# EAGLE board Mini_Rocket_V1 (EAGLE 9.6.2)
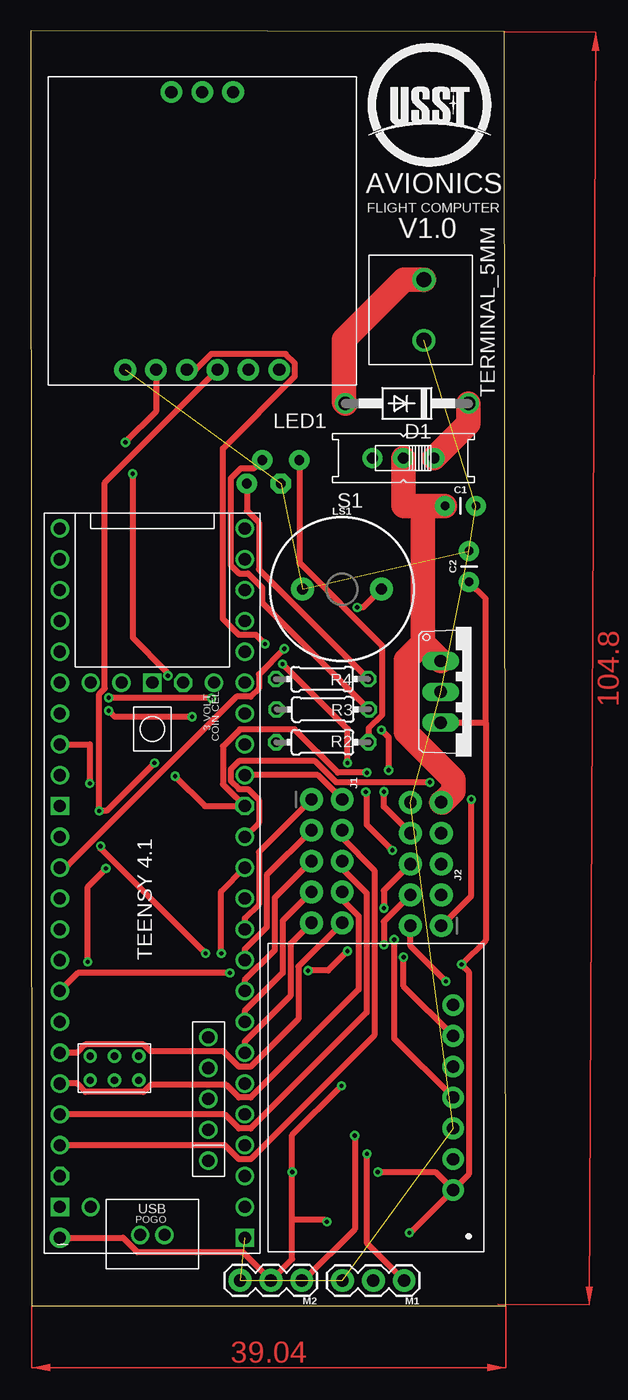
[diagram p0: board, top side]
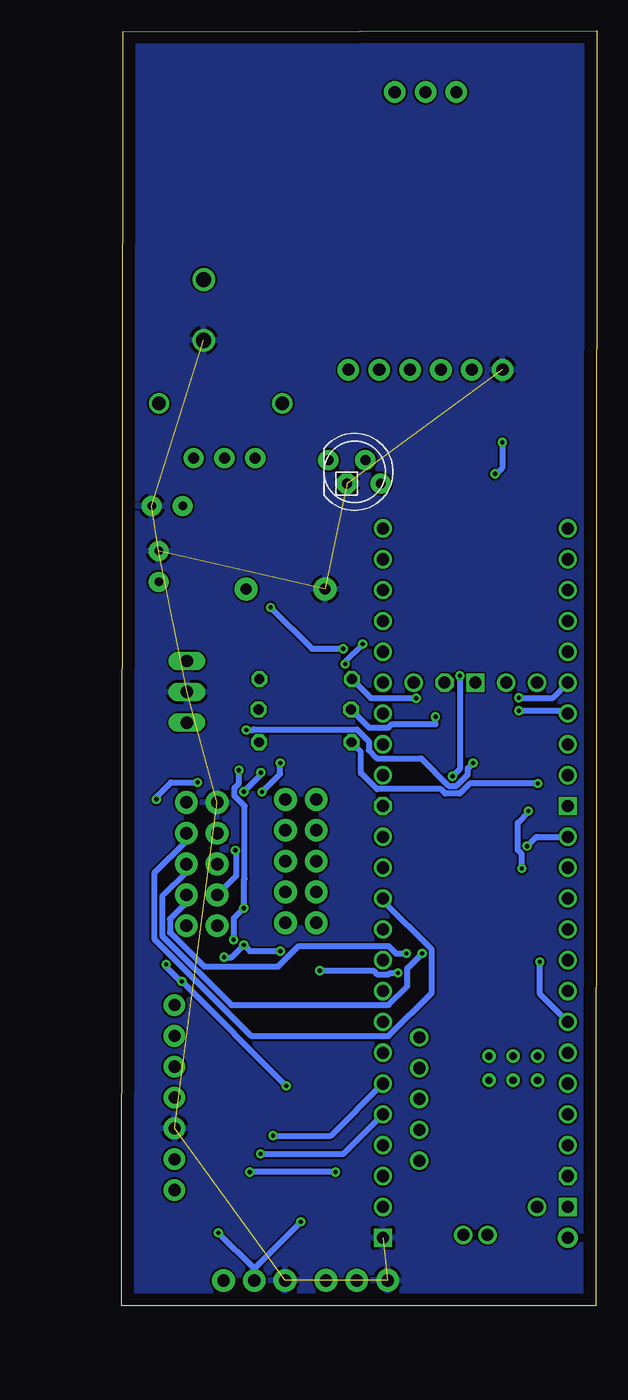
[diagram p1: board, bottom side, seen from below]

Size 39.14 x 105 mm. Coordinates in mm from the lower left corner, seen from the top.
Outline: 0.1,0 39.14,0 39.04,104.9 0,105 0.1,0
Copper layers (1*16): Top 0.035mm / dielectric 1.5mm / Bottom 0.035mm
Design rules "default": minimum track width 6mil, minimum drill 0.35mm, track to track 6mil, track to pad 6mil, pad to pad 6mil, via to via 6mil, smd to smd 6mil, copper to edge 40mil, drill to drill 6mil, minimum pad ring 10mil, minimum via ring 8mil, stop-mask expansion 4mil, vias tented up to drill 0mil, thermal gap 10mil

## Footprints (pad centres in the part's own frame; a part is rotated, then mirrored left to right if it is on the bottom)
BMP280_BREAKOUT = drill 1 pad 1.778: 3VO 7.62,2.54; CS 20.32,2.54; GND 10.16,2.54; SCK 12.7,2.54; SDI 17.78,2.54; SDO 15.24,2.54; VIN 5.08,2.54
CAP-PTH-2.54 = drill 0.7 pad 1.651: 1 -1.27,0; 2 1.27,0
DO41-10 = drill 1.118: A 5.08,0; C -5.08,0
TO220V = drill 1.016 long: 1 -2.54,-2.54; 2 0,-2.54; 3 2.54,-2.54
2X5_NOSILK = drill 1.016 pad 1.88: 1 0,0; 2 0,2.54; 3 2.54,0; 4 2.54,2.54; 5 5.08,0; 6 5.08,2.54; 7 7.62,0; 8 7.62,2.54; 9 10.16,0; 10 10.16,2.54
LED5MMRGB = drill 0.8 pad 1.676: 1 -2.159,0.968; 3 0.889,0.968; 4 2.159,-0.968 | drill 0.8 pad 1.676 octagon: 2 -0.635,-0.968
BUZZER-12MM-KIT = drill 0.9 pad 1.88: + 3.25,0; - -3.25,0
1X03 = drill 1.016 pad 1.88: 1 0,0; 2 2.54,0; 3 5.08,0
0204/7 = drill 0.813 octagon: 1 -3.81,0; 2 3.81,0
EG1218 = drill 0.9 pad 1.676: O -2.54,0; P 0,0; S 2.54,0
TERMINAL_5MM = drill 1.25: 1 2,5; 2 7,5
TEENSY41 = drill 1: 0-RX1/CS1/CRX2 -27.94,-7.62; 1-TX1/MISO1/CTX2 -25.4,-7.62; 2-OUT2 -22.86,-7.62; 3-LRCLK2 -20.32,-7.62; 4-BCLK2 -17.78,-7.62; 5-IN2 -15.24,-7.62; 6-OUT1D -12.7,-7.62; 7-RX2/OUT1A -10.16,-7.62; 8-TX2/IN2 -7.62,-7.62; 9-OUT1C -5.08,-7.62; 10-CS\MQSR -2.54,-7.62; 11-MOSI/CTX1 0,-7.62; 12-MISO/MQSL 2.54,-7.62; 13-SCK/LED 2.54,7.62; 14-A0/TX3/SPDIF_OUT 0,7.62; 15-A1/RX3/SPDIF_IN -2.54,7.62; 16-A2/RX4/SCL1 -5.08,7.62; 17-A3/TX4/SDA1 -7.62,7.62; 18-A4/SDA0 -10.16,7.62; 19-A5/SCL0 -12.7,7.62; 20-A6/TX5/LRCLK1 -15.24,7.62; 21-A7/RX5/BCLK1 -17.78,7.62; 22-A8/CTX1 -20.32,7.62; 23-A9/CRX1/MCLK1 -22.86,7.62; 24-A10/TX6/SCL2 7.62,-7.62; 25-A11/RX6/SDA2 10.16,-7.62; 26-A12/MOSI1 12.7,-7.62; 27-A13/SCK1 15.24,-7.62; 28-RX7 17.78,-7.62; 29-TX7 20.32,-7.62; 30-CRX3 22.86,-7.62; 31-CTX3 25.4,-7.62; 32-OUT1B 27.94,-7.62; 33-MCLK2 27.94,7.62; 34-RX8 25.4,7.62; 35-TX8 22.86,7.62; 36-PWM 20.32,7.62; 37-PWM 17.78,7.62; 38-A14/CS/IN1 15.24,7.62; 39-A15/CS/OUT1A 12.7,7.62; 40-A16/CS1 10.16,7.62; 41-A17/MISO1 7.62,7.62; +5V -24.13,-4.62; D+ -30.25,-1; D- -30.25,1; DM -21.59,-4.62; DP -19.05,-4.62; GND4 -16.51,-4.62; GND5 -13.97,-4.62; ON/OFF 15.24,5.08; PROGRAM 15.24,2.54; VBAT 15.24,-5.08; VUSB -27.94,5.08 | drill 1 octagon: 3V3-1 5.08,-7.62; 3V3-2 15.24,-2.54; 3V3-3 -25.4,7.62 | drill 0.6: G -15.51,3.12; LED -17.51,3.12; R+ -17.51,5.12; R- -15.51,5.12; T+ -15.51,1.12; T- -17.51,1.12 | drill 1 square: GND1 -30.48,-7.62; GND2 15.24,0; GND3 5.08,7.62; GND6 -27.94,7.62 | drill 1 pad 1.676: VIN -30.48,7.62
KX134_BREAKOUT = drill 1 pad 1.778: 3V3 8.89,1.27; ADR/SDO 16.51,1.27; CS 19.05,1.27; GND 6.35,1.27; INT1 12.7,24.13; INT2 10.16,24.13; SCL/SCLK 13.97,1.27; SDA/SDI 11.43,1.27; TRIG 15.24,24.13

## Placement (x,y rotation side)
BMP1  BMP280_BREAKOUT  [BMP280_BREAKOUT]  37.35,4.44 90 top
C1  1uF  [CAP-PTH-2.54]  35.41,65.86 0 top
C2  10uF  [CAP-PTH-2.54]  36.11,60.88 90 top
D1  1N4004  [DO41-10]  31,74.3 180 top
IC1  788TV  [TO220V]  36.32,50.55 270 top
J1  Breakout1  [2X5_NOSILK]  23.13,41.69 270 top
J2  Breakout2  [2X5_NOSILK]  33.83,31.29 90 top
LED1  RGBLED_CA-5MM  [LED5MMRGB]  19.97,68.67 0 bottom
LS1  BUZZER-PTH_KIT  [BUZZER-12MM-KIT]  25.65,59.01 0 top
M1  SERVO  [1X03]  30.77,2.07 180 top
M2  SERVO  [1X03]  22.33,2.08 180 top
R2  220  [0204/7]  24.03,46.4 0 top
R3  220  [0204/7]  24.07,49.1 0 top
R4  220  [0204/7]  24.01,51.6 0 top
S1  SWITCH  [EG1218]  30.7,69.8 180 top
TERMINAL  TERMINAL_5MM  [TERMINAL_5MM]  27.4,86.5 270 top
U$1  TEENSY41  [TEENSY41]  10.02,36.07 90 top
U$4  KX134_BREAKOUT  [KX134_BREAKOUT]  1.43,75.81 0 top

## Library data of the parts
BMP1 = BMP280_BREAKOUT
C1 C2 = SparkFun-Capacitors; PROD_ID: CAP-09128
D1 = diode
IC1 = linear
J1 J2 = SparkFun-Connectors
LED1 S1 = adafruit
LS1 = SparkFun-Electromechanical; PROD_ID: COMP-08253; SF_SKU: COM-07950
M1 M2 = SparkFun-Electromechanical
R2-R4 = rcl; SPICEPREFIX: R
TERMINAL = TERMINAL_5MM
U$1 = teensy
U$4 = KX134_BREAKOUT

## Nets
3V3: J2.8 U$1.3V3-1 U$4.3V3
5V: BMP1.VIN C2.1 IC1.3 J2.2 M1.2 M2.2 U$1.VIN
12V: C1.1 IC1.1 J2.9 S1.P
BLUE: R4.1 U$1.38-A14/CS/IN1
BUZZER: LS1.+ U$1.14-A0/TX3/SPDIF_OUT
CS: J2.7 U$1.10-CS\MQSR
GND: BMP1.GND C1.2 C2.2 IC1.2 J2.10 LED1.2 LS1.- M1.3 M2.3 TERMINAL.2 U$1.GND1 U$4.GND
GRN: R3.1 U$1.39-A15/CS/OUT1A
HEADER1: J1.9 U$1.5-IN2
HEADER2: J1.7 U$1.6-OUT1D
HEADER3: J1.5 U$1.7-RX2/OUT1A
HEADER4: J1.3 U$1.8-TX2/IN2
HEADER5: J1.1 U$1.9-OUT1C
HEADER6: J1.10 U$1.20-A6/TX5/LRCLK1
HEADER7: J1.8 U$1.21-A7/RX5/BCLK1
HEADER8: J1.6 U$1.22-A8/CTX1
HEADER9: J1.4 U$1.23-A9/CRX1/MCLK1
HEADER10: J1.2 U$1.24-A10/TX6/SCL2
MISO: J2.1 U$1.12-MISO/MQSL
MOSI: J2.3 U$1.11-MOSI/CTX1
N$2: LED1.1 R2.2
N$3: LED1.3 R3.2
N$4: LED1.4 R4.2
N$5: D1.A TERMINAL.1
N$6: D1.C S1.O
RED: R2.1 U$1.40-A16/CS1
SCK: J2.5 U$1.13-SCK/LED
SCL: BMP1.SCK J2.6 U$1.19-A5/SCL0 U$4.SCL/SCLK
SDA: BMP1.SDI J2.4 U$1.18-A4/SDA0 U$4.SDA/SDI
TVCX: M1.1 U$1.3-LRCLK2
TVCY: M2.1 U$1.4-BCLK2

## Tracks (layer width: path | path; a pad name or v marks a point on that pad's centre or on a via)
3V3  (via drill 0.35)
  Top 0.5: J2.8 29.1,41.1 v29.1,42.32 | v27.7,43.9 25.3,43.9 21.74,47.46 17.24,47.46 15.83,46.06 15.83,42.94 16.89,41.88 16.91,41.88 U$1.3V3-1 14.35,41.15 v11.9,43.6 | U$4.3V3 10.32,73.62 v7.8,71.1 | v11.3,51.87 11.18,52 11.18,52.23 8.4,55.01 v8.4,68.5
  Bottom 0.5: v29.1,42.32 27.7,43.72 v27.7,43.9 | v7.8,71.1 7.8,69 8.3,68.5 v8.4,68.5 | v11.3,51.87 11.3,44.2 v11.9,43.6
5V  (via drill 0.35)
  Top 0.5: BMP1.VIN 34.9,9.61 34.9,9.62 36.1,10.82 36.1,27.5 v35.5,28.1 37.49,30.09 37.49,48.01 | BMP1.VIN 31.29,6 v31.2,6 | 21.55,7.1 21.55,3.84 M2.2 17.44,4.43 8.77,4.43 7.61,5.59 U$1.VIN | 21.55,7.1 v21.55,11 21.55,14.05 v25.6,18.1 | v28.6,11 33.33,11 BMP1.VIN | v34.2,26.7 31.29,29.61 J2.2 | IC1.3 37.49,48.01 | 37.49,48.01 37.5,48 37.5,58.22 C2.1 | 21.55,7.1 24.2,7.1 v24.4,6.9
  Bottom 0.5: v31.2,6 28.23,3.03 M1.2 28.23,3.07 v24.4,6.9 | v21.55,11 v28.6,11 | v35.5,28.1 35.5,27.9 34.3,26.7 v34.2,26.7 v25.6,18.1 25.5,18
12V
  Top 2: S1.P 30.7,65.9 30.74,65.86 32.3,65.86 | 32.3,65.86 C1.1 | 32.3,65.86 32.3,54.57 | IC1.1 32.3,54.57 | 32.3,54.57 30.9,53.17 30.9,47.26 34.83,43.33 34.83,42.37 33.91,41.45 J2.9
BLUE  (via drill 0.35)
  Top 0.5: v14.9,50.02 6.47,50.02 v6.43,50.06
  Bottom 0.5: R4.1 18.62,50.02 v14.9,50.02 | v6.43,50.06 3.65,50.06 U$1.38-A14/CS/IN1
BUZZER  (via drill 0.35)
  Top 0.5: LS1.+ 27.4,57.51 v26.91,57.51 | U$1.14-A0/TX3/SPDIF_OUT 2.87,36.07 16.95,50.15 18.12,50.15 18.8,50.83 18.8,52 v20.9,54.1
  Bottom 0.5: v26.91,57.51 23.5,54.1 v20.9,54.1
CS
  Bottom 0.5: J2.7 33.83,38.27 36.48,35.62 36.48,30.19 28.5,22.21 17.16,22.21 13.62,25.75 13.62,29.32 17.64,33.34 U$1.10-CS\MQSR
GND  (11 unrouted)
  pour Bottom: -14,116.3 -14,-14.1 71.9,-14.1 71.9,116.3
GRN  (via drill 0.35)
  Top 0.5: v13.3,48.5 6.93,48.5 v6.43,49
  Bottom 0.5: R3.1 18.77,47.61 17.16,47.61 16.88,47.9 13.3,47.9 v13.3,48.5 | v6.43,49 2.63,49 U$1.39-A15/CS/OUT1A
HEADER1
  Top 0.5: J1.9 21.41,29.81 21.41,25.5 17.64,21.73 U$1.5-IN2
HEADER2
  Top 0.5: J1.7 20.75,31.69 20.75,27.39 17.64,24.27 U$1.6-OUT1D
HEADER3
  Top 0.5: J1.5 20.1,33.58 20.1,29.28 17.64,26.82 U$1.7-RX2/OUT1A
HEADER4
  Top 0.5: J1.3 19.45,35.47 19.45,31.16 17.64,29.36 U$1.8-TX2/IN2
HEADER5
  Top 0.5: J1.1 18.8,37.36 18.8,33.05 17.64,31.89 U$1.9-OUT1C
HEADER6
  Top 0.5: J1.10 22.06,27.92 22.06,23.61 18.12,19.67 17.16,19.67 15.89,20.94 9.87,20.94 9.3,21.52 4.5,21.52 3.82,20.83 U$1.20-A6/TX5/LRCLK1
HEADER7
  Top 0.5: U$1.21-A7/RX5/BCLK1 3.82,18.29 4.5,17.6 9.3,17.6 9.87,18.18 16.12,18.18 17.16,17.13 18.12,17.13 27.01,26.03 27.01,32.09 25.67,33.43 J1.8
HEADER8
  Top 0.5: J1.6 25.67,35.97 27.67,33.97 27.67,24.14 18.12,14.59 17.16,14.59 16,15.75 U$1.22-A8/CTX1
HEADER9
  Top 0.5: J1.4 25.67,38.51 28.32,35.86 28.32,22.25 18.12,12.05 17.16,12.05 16,13.21 U$1.23-A9/CRX1/MCLK1
HEADER10
  Top 0.5: J1.2 23.67,43.69 U$1.24-A10/TX6/SCL2
MISO  (via drill 0.35)
  Top 0.5: J2.1 36.3,33.76 v36.3,41.7 | v32.9,43.1 25.18,43.1 23.44,44.85 17.16,44.85 16.48,44.17 16.48,43.21 17.16,42.53 17.89,42.53 18.8,41.63 18.8,39.77 U$1.12-MISO/MQSL
  Bottom 0.5: v36.3,41.7 36.3,41.9 35.1,43.1 v32.9,43.1
MOSI  (via drill 0.35)
  Top 0.5: v15.7,29 15.7,34.13 U$1.11-MOSI/CTX1
  Bottom 0.5: v15.7,29 16.55,29 17.16,29.61 24.59,29.61 26.28,27.92 32.36,27.92 35.17,30.73 35.17,31.85 33.83,33.19 J2.3
N$2
  Top 0.5: LED1.1 22.13,61.18 28.94,54.37 28.94,48.66 27.84,47.56 R2.2
N$3
  Top 0.5: R3.2 19.08,57.9 19.08,59.12 17.89,60.31 17.16,60.31 16.48,60.99 16.48,68.13 17.3,68.94 18.39,68.94 LED1.3
N$4
  Top 0.5: LED1.4 17.81,65.47 18.8,64.49 18.8,60.62 R4.2
N$5
  Top 2: D1.A 25.81,74.41 25.81,79.57 30.74,84.5 TERMINAL.1
N$6
  Top 2: D1.C 36.08,72.64 S1.O
RED  (via drill 0.35)
  Top 0.5: U$1.40-A16/CS1 4.87,46.23 v4.87,43
  Bottom 0.5: v4.87,43 10.47,43 11.31,42.17 12.49,42.17 12.86,42.53 18.12,42.53 19.45,43.86 19.45,45.63 R2.1
SCK  (via drill 0.35)
  Top 0.5: v14.4,29 5.75,37.65 v5.75,37.85
  Bottom 0.5: J2.5 33.83,35.73 35.83,33.73 35.83,30.46 30.11,24.75 17.16,24.75 15.62,26.3 15.62,27.78 v14.4,29 | v5.75,37.85 4.99,38.61 U$1.13-SCK/LED
SCL  (via drill 0.35)
  Top 0.5: J2.6 29.1,34.18 v29.1,32.74 | v29.94,30.14 29.94,22.01 BMP1.SCK | v4.7,28.3 4.7,34.5 v6.2,36 | U$4.SCL/SCLK 6.1,67.78 6.1,50.83 5.65,50.38 v5.65,40.75 6.25,40.75 v10.2,44.7 | v29.5,44.1 29.5,46.8 v28.9,47.4
  Bottom 0.5: v29.94,30.14 29.94,31.9 v29.1,32.74 29.1,35.1 29.02,35.18 29.02,41.13 29.88,42 29.88,42.64 29.5,43.02 v29.5,44.1 | U$1.19-A5/SCL0 4.7,25.67 v4.7,28.3 | v6.2,36 6.2,37.19 6.53,37.52 6.53,39.77 5.6,40.7 v5.65,40.75 | v28.9,47.4 28.34,47.4 28.28,47.46 19.78,47.46 18.8,46.48 18.8,45.75 18.12,45.07 14.48,45.07 12.22,42.82 11.58,42.82 10.65,43.74 10.65,44.25 v10.2,44.7
SDA  (via drill 0.35)
  Top 0.5: J2.4 29.1,31.64 v29.1,29.7 | v26.1,29.2 24.5,27.6 22.71,27.6 22.72,27.59 v22.84,27.59 | v16.4,27.4 3.89,27.4 U$1.18-A4/SDA0 | BMP1.SDI 30.72,26.31 v30.72,28.7 | v29.8,37.5 27.7,39.6 27.7,42.2 v27.6,42.3 | v26.1,44.7 26.1,47.5 v20.75,52.85 | v19.3,54.5 18.57,55.23 17.16,55.23 15.83,56.56 15.83,70.61 21.77,76.55 21.77,77.61 21.02,78.37 14.87,78.37 13.57,77.08 U$4.SDA/SDI
  Bottom 0.5: v26.1,29.2 28.6,29.2 v29.1,29.7 30.1,28.7 v30.72,28.7 | v22.84,27.59 18.42,27.59 18.12,27.29 17.16,27.29 17.05,27.4 v16.4,27.4 | J2.4 29.7,35.42 29.7,37.4 v29.8,37.5 | v27.6,42.3 26.1,43.8 v26.1,44.7 | v19.3,54.5 20.75,53.05 v20.75,52.85
TVCX  (via drill 0.35)
  Top 0.5: M1.1 27.71,5.13 v27.71,12.5
  Bottom 0.5: v27.71,12.5 20.89,12.5 U$1.3-LRCLK2
TVCY  (via drill 0.35)
  Top 0.5: v26.7,14 26.7,6.3 22.48,2.08 M2.1
  Bottom 0.5: v26.7,14 21.93,14 U$1.4-BCLK2
(copper drawn outside any net)
  shapes: Top area x2

## Text on the board
tPlace: AVIONICS | FLIGHT COMPUTER | V1.0